# Altium PCB PCB.PcbDoc
Units mil, origin at the board's own origin, x right, y up, seen from the top; angles counter-clockwise.
Board outline 6000 x 4000 mil, 2 copper layers (Top Layer, Bottom Layer); 9 components, 8 nets, 26 pads, 0 vias.
Unrouted connection lines stored in the file: 10.
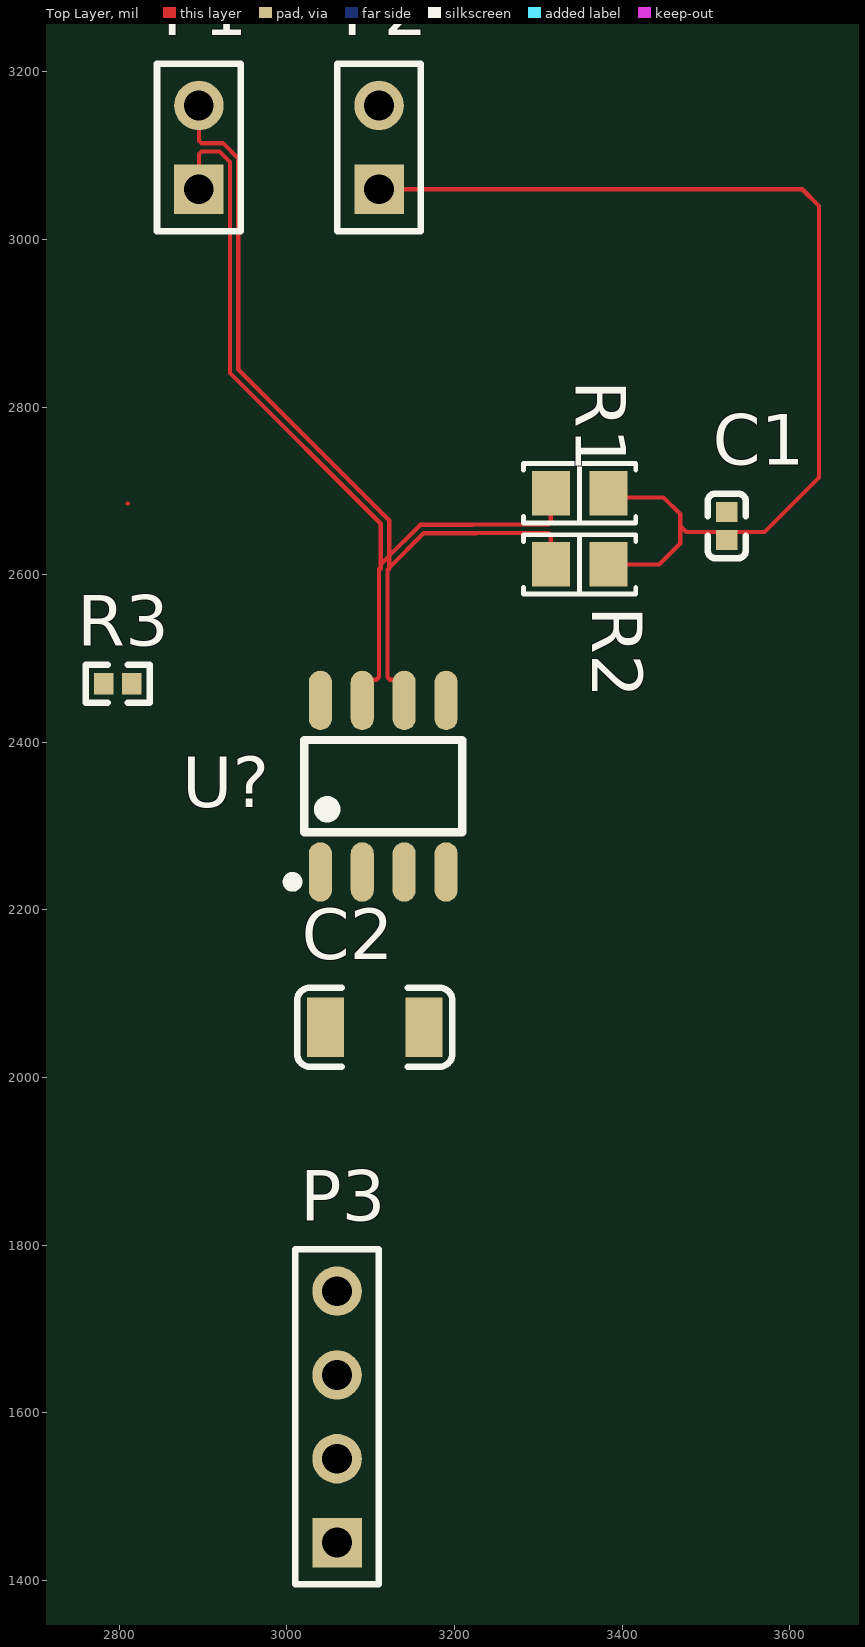
[diagram p0: Top Layer view]
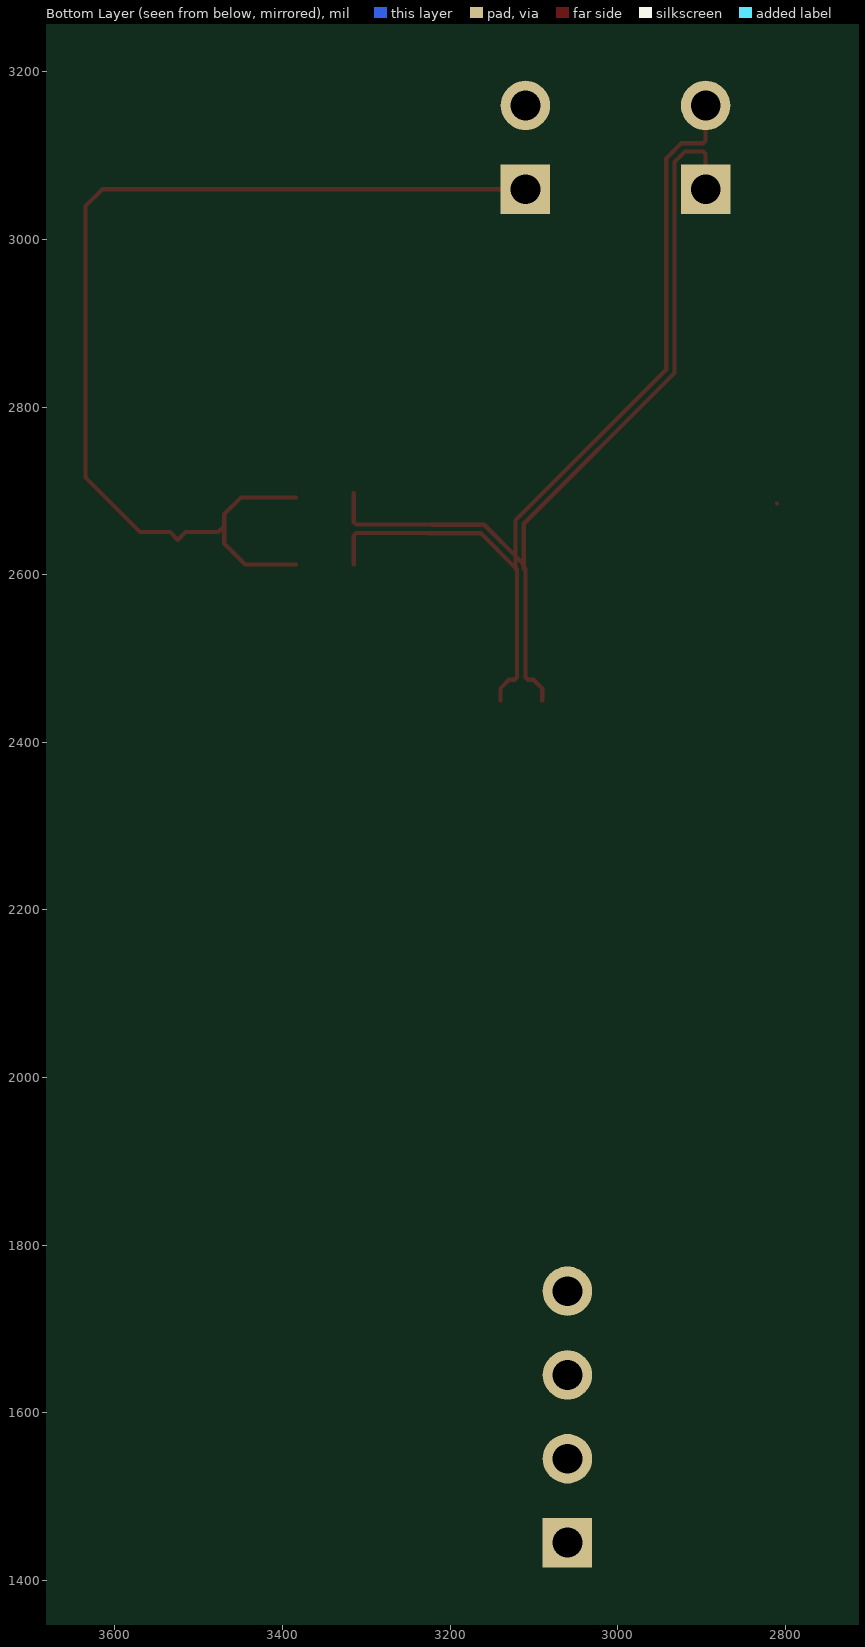
[diagram p1: Bottom Layer view, seen from below]

## Layer stack, top to bottom
Top Solder: solder mask 0.4, Solder Resist, Dk 3.5
Top Layer: signal copper 1.4
Dielectric 1: dielectric 12.6, FR-4, Dk 4.8
Bottom Layer: signal copper 1.4
Bottom Solder: solder mask 0.4, Solder Resist, Dk 3.5

## Board outline
0,0 6000,0 6000,4000 0,4000

## Design rules (kind name [scope] priority, off if disabled: settings)
BoardOutlineClearance [All] p1: gap=7.87 ignorepadtopadclearanceinfootprint=FALSE
Clearance [All] p1: gap=5 ignorepadtopadclearanceinfootprint=FALSE except(9.84: Arc-Hole Track-Hole SMDPad-Hole THPad-Hole Via-Hole Fill-Hole Poly-Hole Region-Hole Text-Hole)
ComponentClearance [All] p1: gap=5 collisioncheckmode=3 verticalgap=5 showdistances=TRUE
DiffPairsRouting [All] p1: maxlimit=10 minlimit=5 mostfreqgap=5 toplayer_minwidth=5 toplayer_maxwidth=1000 toplayer_prefwidth=5 bottomlayer_minwidth=5 bottomlayer_maxwidth=1000 bottomlayer_prefwidth=5 maxuncoupledlength=500
Height [All] p1: minheight=0 maxheight=71497.94 prefheight=500
HoleSize [All] p1: absolutevalues=TRUE maxlimit=248.03 minlimit=11.81 maxpercent=80.000 minpercent=20.000
HoleToHoleClearance [All] p1: gap=9.84 allowstackedmicrovias=FALSE
MinimumAnnularRing [All] p1: minimumring=3
MinimumSolderMaskSliver [All] p1: minsoldermaskwidth=0
PlaneClearance [All] p1: clearance=5
PlaneConnect PlaneConnectPowerPads [InPadClass('PowerPads')] p1: planeconnectstyle=Direct reliefexpansion=20 reliefentries=4 reliefconductorwidth=10 reliefairgap=10
PlaneConnect [All] p2: pad.planeconnectstyle=Relief pad.reliefexpansion=11.81 pad.reliefentries=4 pad.reliefconductorwidth=5 pad.reliefairgap=5 via.planeconnectstyle=Direct via.reliefexpansion=11.81 via.reliefentries=4 via.reliefconductorwidth=5 via.reliefairgap=5
PolygonConnect PolygonConnectPowerPads [All vs (InPadClass('PowerPads'))] p1: connectstyle=Direct reliefconductorwidth=10 reliefentries=4 polygonreliefangle="90 Angle" airgapwidth=10
PolygonConnect [All] p2: thpad.connectstyle=Relief thpad.reliefconductorwidth=5 thpad.reliefentries=4 thpad.polygonreliefangle="90 Angle" thpad.airgapwidth=5 smdpad.connectstyle=Relief smdpad.reliefconductorwidth=5 smdpad.reliefentries=4 smdpad.polygonreliefangle="90 Angle" smdpad.airgapwidth=5 via.connectstyle=Direct via.reliefconductorwidth=5 via.reliefentries=4 via.polygonreliefangle="90 Angle" via.airgapwidth=5
RoutingVias [All] p1: holewidth=11.81 width=23.62 viastyle="Through Hole" minholewidth=11.81 minwidth=23.62 maxholewidth=23.62 maxwidth=259.84
SilkToSilkClearance [All] p1: silktosilkclearance=0
SilkToSolderMaskClearance [IsPad] p1: minsilkscreentomaskgap=5 clearancetoexposedcopper=TRUE
SolderMaskExpansion [All] p1: expansion=2.95 istentingtop=FALSE
Width [All] p1: maxlimit=1000 minlimit=5 preferedwidth=5 minimp=50.000000 maximp=50.000000 favimp=50.000000
20 further rules are at their usual default settings.

## Classes and differential pairs
component class Schematic: C1 C2 P2 P3 R1 R3 U1 U?
differential pair CAN: +CAN_P -CAN_N

## Components (designator, comment, footprint, x,y, rotation, side; value= is the part's Value field where it differs from the comment)
C1 "4.7uF" 0402_C 3525,2658.27 r270 top
C2 "100nF" 1206_C 3104.88,2060 r0 top
P1 "Header 2" HDR1X2 2895,3060 r90 top
P2 "Header 2" HDR1X2 3110,3060 r90 top
P3 "Header 4" HDR1X4 3059.88,1445 r90 top
R1 "60.4 Ohms" "RES 0805_2012" 3349.45,2697.29 r180 top
R2 "60.4 Ohms" "RES 0805_2012" 3349.45,2612.29 r0 top
R3 "10KΩ ±1%" 0402_R 2798.15,2470 r0 top
U? "CAN/SN65HVD230DR" SOIC-8_150mil 3115,2347.64 r0 top

## Footprints (in the part's own frame and the unit in brackets; to place one, negate y for a bottom-side part, rotate by r counter-clockwise, add the part's x,y. Pads: shape width x height; smd on the part's side, far side on the other; paste and mask are expansions set on the pad)
0402_C [mm]
  rect 0.6x0.65 smd mask+0.051: 1(-0.425,0) 2(0.425,0)
  silkscreen extent -0.97,-0.58 0.97,0.58, body extent -0.48,-0.3 0.52,0.3, height 0.2
0402_R [mm]
  rect 0.6x0.65 smd mask+0.051: 1(-0.425,0) 2(0.425,0)
  silkscreen extent -0.97,-0.58 0.97,0.58, body extent -0.57,-0.27 0.58,0.28, height 0.41
1206_C [mm]
  rect 1.13x1.8 smd: 1(-1.49,0) 2(1.49,0)
  silkscreen extent -2.36,-1.2 2.35,1.2, body extent -1.6,-0.81 1.6,0.79, height 1
HDR1X2 [mm] "Connector; Header; 2 Position"
  rect 1.5x1.5 hole 0.9: 1(0,0)
  round 1.5 hole 0.9: 2(2.54,0)
  silkscreen extent -1.27,-1.27 3.81,1.27
HDR1X4 [mm] "Connector; Header; 4 Position"
  rect 1.5x1.5 hole 0.9: 1(0,0)
  round 1.5 hole 0.9: 2(2.54,0) 3(5.08,0) 4(7.62,0)
  silkscreen extent -1.27,-1.27 8.89,1.27
"RES 0805_2012" [mm] "Chip Resistor, 2-Leads, Body 2.00x1.25mm, IPC Medium Density"
  rect 1.15x1.35 smd: 1(-0.875,0) 2(0.875,0)
  silkscreen extent -1.7,-0.9 1.7,0.9, body extent -1,-0.62 1,0.63, height 0.6
SOIC-8_150mil [mm]
  oval 0.7x1.8 smd: 1(-1.905,-2.6) 2(-0.635,-2.6) 3(0.635,-2.6) 4(1.905,-2.6) 5(1.905,2.6) 6(0.635,2.6) 7(-0.635,2.6) 8(-1.905,2.6)
  silkscreen extent -2.9,-3.05 2.4,1.4

## Part data
C1: library part "0402 4.7uF (475) 20% 10V", "Chip capacitor", Manufacturer="Samsung Electro-Mechanics", Package=0402, PartNumber=CL05A475MP5NRNC, SuppliersPartNumber=C23733, Tolerance=20%, Voltage=10V, Capacitance=4.7uF, ComponentLink1Description="Supplier link", ComponentLink1URL=http://www.szlcsc.com/product/details_24469.html, Supplier=LC
C2: library part "1206 100nF (104) 10% 50V", "Chip capacitors", Manufacturer="Samsung Electro-Mechanics", Package=1206, PartNumber=CL31B104KBCNNNC, SuppliersPartNumber=C24497, Tolerance=10%, Voltage=50V, Capacitance=100nF, ComponentLink1Description="Supplier link", ComponentLink1URL=http://www.szlcsc.com/product/details_25237.html, Supplier=LC
P1 P2: "Header, 2-Pin", LatestRevisionDate=17-Jul-2002, LatestRevisionNote="Re-released for DXP Platform.", Publisher="Altium Limited"
P3: "Header, 4-Pin", LatestRevisionDate=17-Jul-2002, LatestRevisionNote="Re-released for DXP Platform.", Publisher="Altium Limited"
R1 R2: library part RMCF0805FT60R4, "RES 60.4 OHM 1% 1/8W 0805", Device Package="0805 (2012 Metric)", Manufacturer="Stackpole Electronics Inc", Operating Temperature="-55°C ~ 155°C", Power (Watts)="0.125W, 1/8W", Ratings=AEC-Q200, Supplier Device Package=0805, Supplier Part Number 1=RMCF0805FT60R4CT-ND, Temperature Coefficient=±100ppm/°C, Tolerance=±1%, ComponentLink1Description=Datasheet, ComponentLink1URL=https://www.seielect.com/catalog/sei-packaging.pdf, ComponentLink2Description="DigiKey Link", ComponentLink2URL=http://digikey.com/product-detail/en/stackpole-electronics-inc/RMCF0805FT60R4/RMCF0805FT60R4CT-ND/1942327, Composition="Thick Film", Features="Automotive AEC-Q200", Height - Seated (Max)="0.026\" (0.65mm)", LastUpdated="2020-09-02 1:15:14 AM", Lifecycle Status=Active, Minimum Order=1, Number of Terminations=2, Package / Case="0805 (2012 Metric)", Packaging=CutTape, Part Number=RMCF0805FT60R4, Part Status=Active, PartId=32532, Price=0.10, Resistance="60.4 Ohms", Series=RMCF, Size / Dimension="0.079\" L x 0.049\" W (2.00mm x 1.25mm)", Supplier 1=DigiKey
R3: library part "0402 10K (1002) 1%", "Chip resistor", Manufacturer="Uniroyal Elec", Package=0402, PartNumber=0402WGF1002TCE, Power=1/16W, Resistance=10KΩ, SuppliersPartNumber=C25744, Tolerance=1%, ComponentLink1Description="Supplier link", ComponentLink1URL=http://www.szlcsc.com/product/details_26487.html, Supplier=LC
U?: library part CAN/SN65HVD230DR_[C12084], "CAN", Package=SOIC-8_150mil, SuppliersPartNumber=C12084, ComponentLink1Description=供应商链接, ComponentLink1URL=http://www.szlcsc.com/product/details_12661.html, Supplier=LC

## Nets (pads, with @x,y where several pads share a name; then routed paths per layer and width w, separated by ;. In a path a pad name is that pad's centre, name@x,y a point inside that pad or via, vN(x,y) a via of type N, cw(c..) or ccw(c..) an arc to the next point about the centre after c; other vN are vias at no path point)
CAN_N: P1.2 R2.1 U?.6 | length 1118.9
  Top Layer w5: P1.2 2895,3117.93 2897.93,3115 2923.8,3115 2942.03,3096.78 2942.03,2845 3122.07,2664.96 3122.07,2608.24 ; P1.2@2908.55,3138.23 2908.55,3168.7 P1.2@2915,3175.15 ; 3122.07,2607.07 3122.07,2608.24 ; U?.6 3140,2464.26 3129.58,2474.68 3122.93,2474.68 3120,2477.61 3120,2606.17 3122.07,2608.24 ; R2.1 3315,2646.86 3312.07,2649.79 3226.16,2649.79 3225.94,2649.57 3163.4,2649.57 3122.07,2608.24
CAN_P: P1.1 R1.2 U?.7 | length 1073.2
  Top Layer w5: P1.1 2895,3102.07 2897.93,3105 2919.66,3105 2932.03,3092.63 2932.03,2840.86 3112.07,2660.81 3112.07,2612.38 ; U?.7 3090,2464.26 3100.42,2474.68 3107.07,2474.68 3110,2477.61 3110,2607.07 ; 3112.07,2607.07 3112.07,2612.38 ; R1.2 3315,2662.71 3312.07,2659.79 3222.02,2659.79 3221.8,2659.57 3159.26,2659.57 3117.65,2617.96 3112.07,2612.38
GND: C1.1 C2.1 P3.2 R3.2 U?.2
NetC1_2: C1.2 P2.1 R1.1 R2.2 | length 1284.6
  Top Layer w5: P2.1 3615,3060 3635,3040 3635,2715.86 3569.99,2650.85 3534.31,2650.85 C1.2 3515.69,2650.85 3476.65,2650.85 3470,2657.5 ; R2.2 3444.45,2612.29 3469.45,2637.29 3469.45,2672.29 3449.45,2692.29 R1.1@3383.9,2692.29
NetR3_1: R3.1 U?.8
RX: P3.4 U?.4
TX: P3.3 U?.1
VCC3V3: C2.2 P3.1 U?.3
pads on no net: P2.2 U?.5

## Silkscreen, mask and mechanical layers (free items; w line width, h text height)
Top Overlay:
  drawing of 13 lines, arcs and shapes, not listed